# Altium PCB PCB_BearlyML Module Board_2022-12-21.pcbdoc
Units mm, origin at the board's own origin, x right, y up, seen from the top; angles counter-clockwise.
Board outline 141.4 x 81.42 mm, 2 copper layers (Top Layer, Bottom Layer); 59 components, 62 nets, 756 pads, 262 vias.
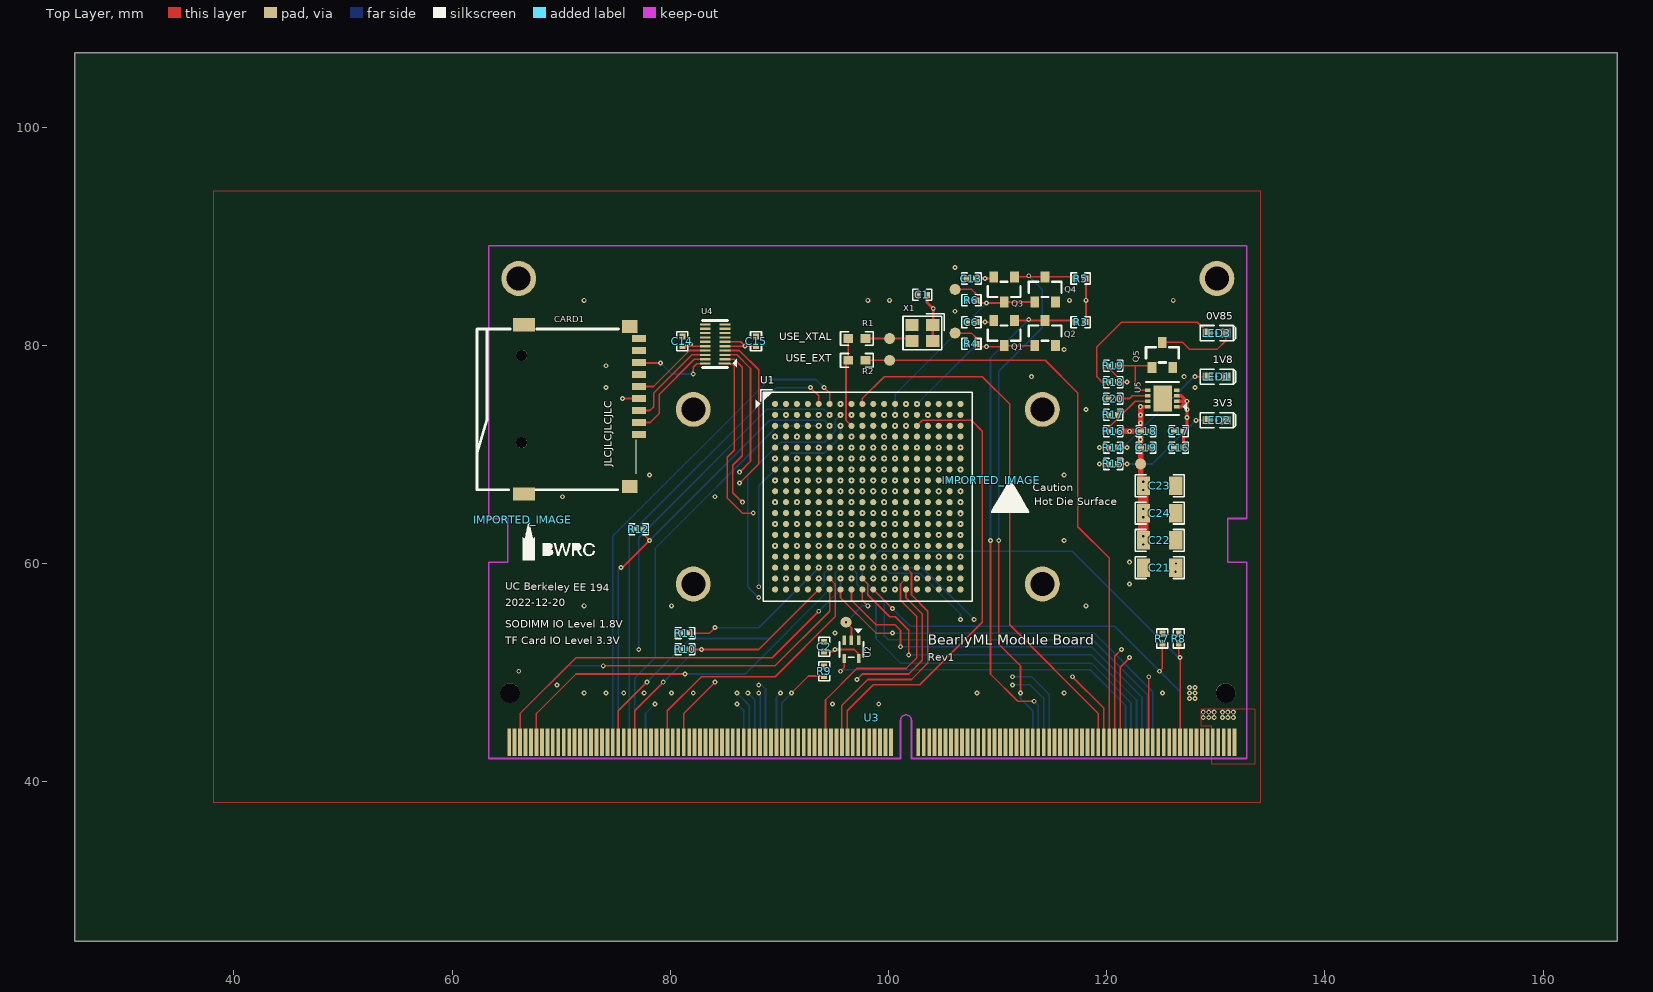
[diagram p0: Top Layer view]
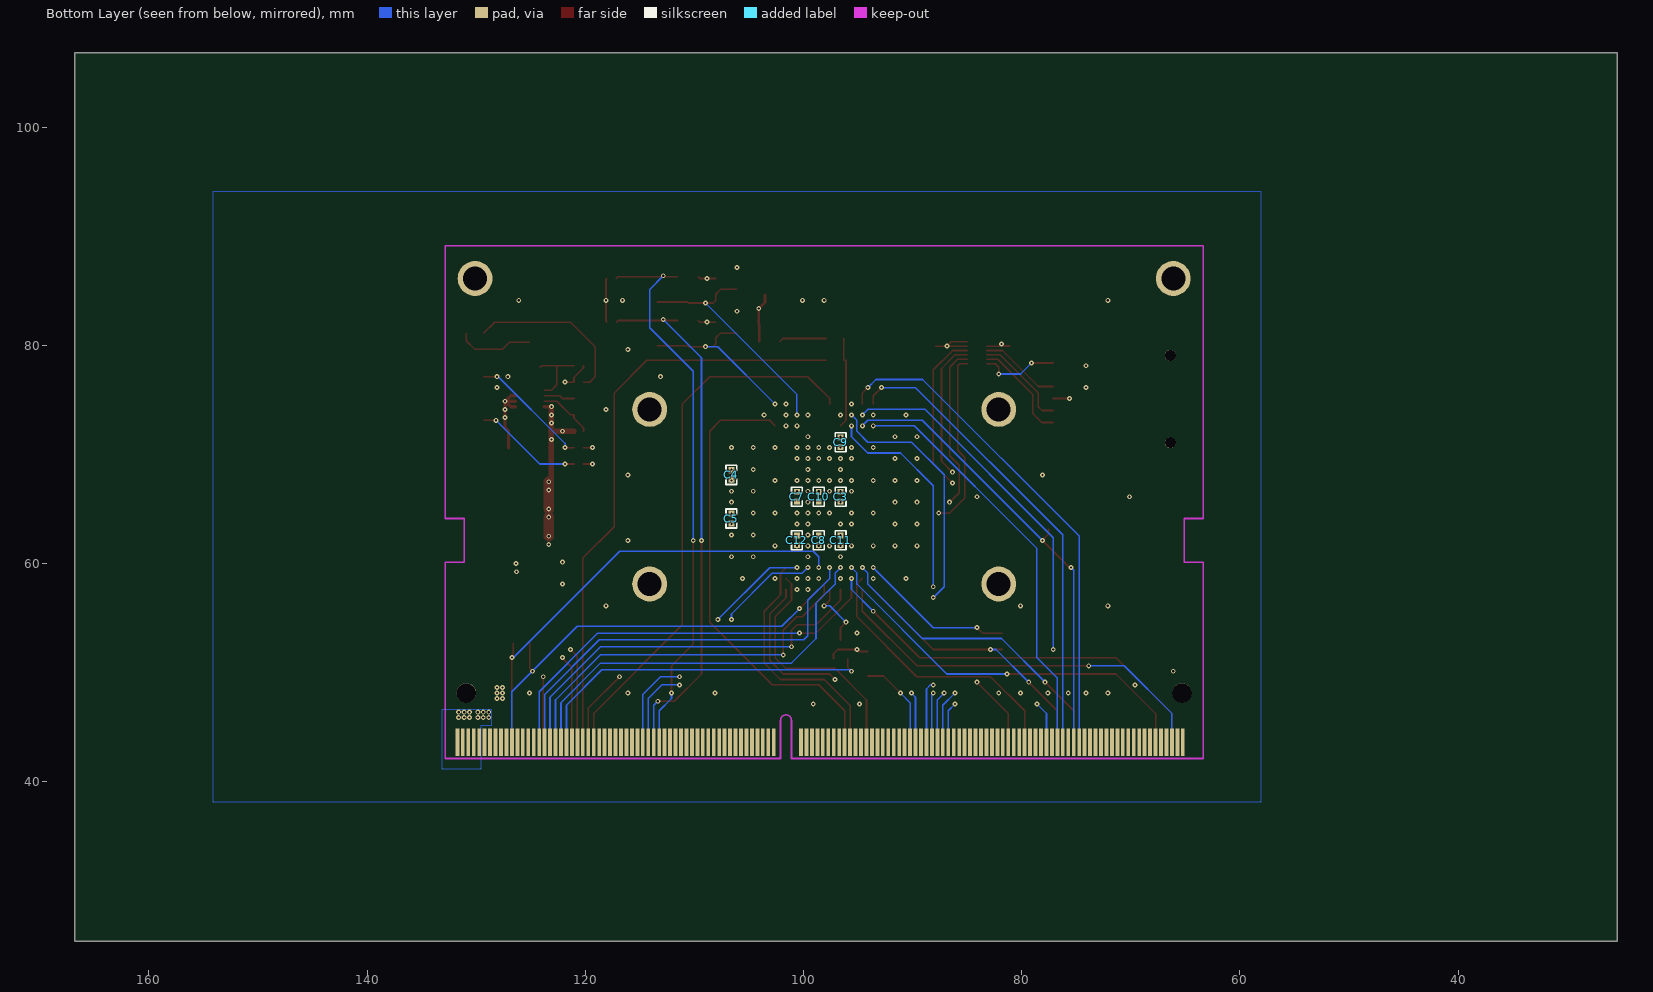
[diagram p1: Bottom Layer view, seen from below]

## Layer stack, top to bottom
Top Layer: signal copper (thickness not stored)
Dielectric: dielectric 0.32, FR-4, Dk 4.8
Bottom Layer: signal copper (thickness not stored)

## Board outline
166.8,25.4 25.4,25.4 25.4,106.825 166.8,106.825

## Components (designator, comment, footprint, x,y, rotation, side; value= is the part's Value field where it differs from the comment)
C1 "100n" CAPA-0402#1 103.1,84.625 r0 top
C2 "100n" CAPA-0402#1 94.099,52.376 r270 top
C3 "100n" CAPA-0402#2 96.599,66.125 r270 bottom
C4 "100n" CAPA-0402#2 106.599,68.124 r90 bottom
C5 "100n" CAPA-0402#2 106.599,64.126 r90 bottom
C6 "100n" CAPA-0402#1 107.599,82.124 r0 top
C7 "100n" CAPA-0402#2 100.599,66.125 r270 bottom
C8 "100n" CAPA-0402#2 98.6,62.124 r90 bottom
C9 "100n" CAPA-0402#2 96.599,71.124 r90 bottom
C10 "1u" CAPA-0402#2 98.6,66.125 r270 bottom
C11 "1u" CAPA-0402#2 96.599,62.124 r90 bottom
C12 "1u" CAPA-0402#2 100.599,62.124 r90 bottom
C13 "100n" CAPA-0402#1 107.599,86.125 r0 top
C14 "100n" CAPA-0402#1 81.1,80.374 r270 top
C15 "100n" CAPA-0402#1 87.851,80.374 r270 top
C16 "10u" CAPA-0402#1 126.599,70.626 r0 top
C17 "100n" CAPA-0402#1 126.599,72.124 r0 top
C18 "100n" CAPA-0402#1 123.599,72.124 r180 top
C19 "10u" CAPA-0402#1 123.599,70.626 r180 top
C20 "1n" CAPA-0402#1 120.599,75.124 r0 top
C21 "22u" CAPA-1206 124.849,59.625 r0 top
C22 "22u" CAPA-1206 124.849,62.124 r180 top
C23 "2u2" CAPA-1206 124.849,67.126 r180 top
C24 "2u2" CAPA-1206 124.849,64.624 r180 top
CARD1 "TF-01A" TF-SMD_TF-01A 71.849,74.126 r270 top
IMPORTED_IMAGE "IMPORTED_IMAGE" IMPORTED_IMAGE 109.395,67.638 r0 top
IMPORTED_IMAGE "IMPORTED_IMAGE" IMPORTED_IMAGE 66.49,64.004 r0 top
LED1 "LED-0603_B" LED-0603 130.099,77.126 r0 top
LED2 "LED-0603_B" LED-0603 130.099,73.125 r0 top
LED3 "LED-0603_B" LED-0603 130.099,81.124 r0 top
Q1 "AO3401A" SOT-23_L2.9-W1.3-P1.90-LS2.4-BR 110.6,81.125 r90 top
Q2 "AO3400A" SOT-23_L2.9-W1.3-P1.90-LS2.4-BR 114.35,81.125 r270 top
Q3 "AO3401A" SOT-23_L2.9-W1.3-P1.90-LS2.4-BR 110.6,85.125 r90 top
Q4 "AO3400A" SOT-23_L2.9-W1.3-P1.90-LS2.4-BR 114.35,85.125 r270 top
Q5 "FDV301N" SOT-23_L2.9-W1.3-P1.90-LS2.4-BR 125.099,79.125 r270 top
R1 "0R" RES-0603 97.1,80.625 r0 top
R2 "0R" RES-0603 97.1,78.625 r0 top
R3 "1k" RES-0402 117.599,82.124 r0 top
R4 "1k" RES-0402 107.599,80.125 r0 top
R5 "1k" RES-0402 117.599,86.125 r0 top
R6 "1k" RES-0402 107.599,84.126 r0 top
R7 "100k" RES-0402 125.1,53.125 r90 top
R8 "100k" RES-0402 126.599,53.125 r90 top
R9 "100k" RES-0402 94.099,50.125 r90 top
R10 "100k" RES-0402 81.351,52.124 r180 top
R11 "100k" RES-0402 81.351,53.626 r180 top
R12 "100k" RES-0402 77.1,63.125 r180 top
R14 "1k" RES-0402 120.599,70.626 r180 top
R15 "1k" RES-0402 120.599,69.125 r180 top
R16 "130k" RES-0402 120.599,72.124 r0 top
R17 "120k" RES-0402 120.599,73.626 r0 top
R18 "1k" RES-0402 120.599,76.625 r0 top
R19 "10k" RES-0402 120.599,78.124 r180 top
U1 "BearlyML" FC-PBGA-1.0-324-R18-C18_INTEL 98.1,66.125 r0 top
U2 "SN74LVC1G04DCKR" SOT-353_L2.1-W1.3-P0.65-LS2.3-BR 96.599,52.124 r90 top
U3 "SODIMM" "SODIMM 260" 98.1,42.124 r0 top
U4 "TXB0108DQSR" SON-20_L4.0-W2.0-P0.40-BL 84.101,80.124 r90 top
U5 "MCP1726-ADJE/MF" DFN-8_L3.0-W3.0-P0.50-LS3.0-BL-EP 125.101,75.125 r90 top
X1 "20MHz" OSC-SMD_4P-L2.5-W2.0-BL 103.1,81.125 r180 top

## Footprints (in the part's own frame and the unit in brackets; to place one, negate y for a bottom-side part, rotate by r counter-clockwise, add the part's x,y. Pads: shape width x height; smd on the part's side, far side on the other; paste and mask are expansions set on the pad)
CAPA-0402#1 [mm]
  rect 0.566x0.54 smd: 1(-0.433,0) 2(0.433,0)
  silkscreen extent -0.87,-0.5 0.87,0.5
CAPA-0402#2 [mm]
  rect 0.566x0.54 smd: 1(0.433,0) 2(-0.433,0)
  silkscreen extent -0.87,-0.5 0.87,0.5
CAPA-1206 [mm]
  rect 1.208x1.701 smd: 1(-1.479,0) 2(1.479,0)
  silkscreen extent -2.25,-1 2.25,1
DFN-8_L3.0-W3.0-P0.50-LS3.0-BL-EP [mm]
  rect 0.3x0.5 smd: 1(-0.75,-1.325) 2(-0.25,-1.325) 3(0.25,-1.325) 4(0.75,-1.325) 5(0.75,1.325) 6(0.25,1.325) 7(-0.25,1.325) 8(-0.75,1.325)
  rect 2.4x1.7 smd: 9(0,-0.025)
  silkscreen extent -1.5,-2.25 1.5,1.48
FC-PBGA-1.0-324-R18-C18_INTEL [mm]
  round 0.56 smd: A1(-8.5,8.5) A2(-7.5,8.5) A3(-6.5,8.5) A4(-5.5,8.5) A5(-4.5,8.5) A6(-3.5,8.5) A7(-2.5,8.5) A8(-1.5,8.5) A9(-0.5,8.5) A10(0.5,8.5) A11(1.5,8.5) A12(2.5,8.5) A13(3.5,8.5) A14(4.5,8.5) A15(5.5,8.5) A16(6.5,8.5) A17(7.5,8.5) A18(8.5,8.5) B1(-8.5,7.5) B2(-7.5,7.5) B3(-6.5,7.5) B4(-5.5,7.5) B5(-4.5,7.5) B6(-3.5,7.5) B7(-2.5,7.5) B8(-1.5,7.5) B9(-0.5,7.5) B10(0.5,7.5) B11(1.5,7.5) B12(2.5,7.5) B13(3.5,7.5) B14(4.5,7.5) B15(5.5,7.5) B16(6.5,7.5) B17(7.5,7.5) B18(8.5,7.5) C1(-8.5,6.5) C2(-7.5,6.5) C3(-6.5,6.5) C4(-5.5,6.5) C5(-4.5,6.5) C6(-3.5,6.5) C7(-2.5,6.5) C8(-1.5,6.5) C9(-0.5,6.5) C10(0.5,6.5) C11(1.5,6.5) C12(2.5,6.5) C13(3.5,6.5) C14(4.5,6.5) C15(5.5,6.5) C16(6.5,6.5) C17(7.5,6.5) C18(8.5,6.5) D1(-8.5,5.5) D2(-7.5,5.5) D3(-6.5,5.5) D4(-5.5,5.5) D5(-4.5,5.5) D6(-3.5,5.5) D7(-2.5,5.5) D8(-1.5,5.5) D9(-0.5,5.5) D10(0.5,5.5) D11(1.5,5.5) D12(2.5,5.5) D13(3.5,5.5) D14(4.5,5.5) D15(5.5,5.5) D16(6.5,5.5) D17(7.5,5.5) D18(8.5,5.5) E1(-8.5,4.5) E2(-7.5,4.5) E3(-6.5,4.5) E4(-5.5,4.5) E5(-4.5,4.5) E6(-3.5,4.5) E7(-2.5,4.5) E8(-1.5,4.5) E9(-0.5,4.5) E10(0.5,4.5) E11(1.5,4.5) E12(2.5,4.5) E13(3.5,4.5) E14(4.5,4.5) E15(5.5,4.5) E16(6.5,4.5) E17(7.5,4.5) E18(8.5,4.5) F1(-8.5,3.5) F2(-7.5,3.5) F3(-6.5,3.5) F4(-5.5,3.5) F5(-4.5,3.5) F6(-3.5,3.5) F7(-2.5,3.5) F8(-1.5,3.5) F9(-0.5,3.5) F10(0.5,3.5) F11(1.5,3.5) F12(2.5,3.5) F13(3.5,3.5) F14(4.5,3.5) F15(5.5,3.5) F16(6.5,3.5) F17(7.5,3.5) F18(8.5,3.5) G1(-8.5,2.5) G2(-7.5,2.5) G3(-6.5,2.5) G4(-5.5,2.5) G5(-4.5,2.5) G6(-3.5,2.5) G7(-2.5,2.5) G8(-1.5,2.5) G9(-0.5,2.5) G10(0.5,2.5) G11(1.5,2.5) G12(2.5,2.5) G13(3.5,2.5) G14(4.5,2.5) G15(5.5,2.5) G16(6.5,2.5) G17(7.5,2.5) G18(8.5,2.5) H1(-8.5,1.5) H2(-7.5,1.5) H3(-6.5,1.5) H4(-5.5,1.5) H5(-4.5,1.5) H6(-3.5,1.5) H7(-2.5,1.5) H8(-1.5,1.5) H9(-0.5,1.5) H10(0.5,1.5) H11(1.5,1.5) H12(2.5,1.5) H13(3.5,1.5) H14(4.5,1.5) H15(5.5,1.5) H16(6.5,1.5) H17(7.5,1.5) H18(8.5,1.5) J1(-8.5,0.5) J2(-7.5,0.5) J3(-6.5,0.5) J4(-5.5,0.5) J5(-4.5,0.5) J6(-3.5,0.5) J7(-2.5,0.5) J8(-1.5,0.5) J9(-0.5,0.5) J10(0.5,0.5) J11(1.5,0.5) J12(2.5,0.5) J13(3.5,0.5) J14(4.5,0.5) J15(5.5,0.5) J16(6.5,0.5) J17(7.5,0.5) J18(8.5,0.5) K1(-8.5,-0.5) K2(-7.5,-0.5) K3(-6.5,-0.5) K4(-5.5,-0.5) K5(-4.5,-0.5) K6(-3.5,-0.5) K7(-2.5,-0.5) K8(-1.5,-0.5) K9(-0.5,-0.5) K10(0.5,-0.5) K11(1.5,-0.5) K12(2.5,-0.5) K13(3.5,-0.5) K14(4.5,-0.5) K15(5.5,-0.5) K16(6.5,-0.5) K17(7.5,-0.5) K18(8.5,-0.5) L1(-8.5,-1.5) L2(-7.5,-1.5) L3(-6.5,-1.5) L4(-5.5,-1.5) L5(-4.5,-1.5) L6(-3.5,-1.5) L7(-2.5,-1.5) L8(-1.5,-1.5) L9(-0.5,-1.5) L10(0.5,-1.5) L11(1.5,-1.5) L12(2.5,-1.5) L13(3.5,-1.5) L14(4.5,-1.5) L15(5.5,-1.5) L16(6.5,-1.5) L17(7.5,-1.5) L18(8.5,-1.5) M1(-8.5,-2.5) M2(-7.5,-2.5) M3(-6.5,-2.5) M4(-5.5,-2.5) M5(-4.5,-2.5) M6(-3.5,-2.5) M7(-2.5,-2.5) M8(-1.5,-2.5) M9(-0.5,-2.5) M10(0.5,-2.5) M11(1.5,-2.5) M12(2.5,-2.5) M13(3.5,-2.5) M14(4.5,-2.5) M15(5.5,-2.5) M16(6.5,-2.5) M17(7.5,-2.5) M18(8.5,-2.5) N1(-8.5,-3.5) N2(-7.5,-3.5) N3(-6.5,-3.5) N4(-5.5,-3.5) N5(-4.5,-3.5) N6(-3.5,-3.5) N7(-2.5,-3.5) N8(-1.5,-3.5) N9(-0.5,-3.5) N10(0.5,-3.5) N11(1.5,-3.5) N12(2.5,-3.5) N13(3.5,-3.5) N14(4.5,-3.5) N15(5.5,-3.5) N16(6.5,-3.5) N17(7.5,-3.5) N18(8.5,-3.5) P1(-8.5,-4.5) P2(-7.5,-4.5) P3(-6.5,-4.5) P4(-5.5,-4.5) P5(-4.5,-4.5) P6(-3.5,-4.5) P7(-2.5,-4.5) P8(-1.5,-4.5) P9(-0.5,-4.5) P10(0.5,-4.5) P11(1.5,-4.5) P12(2.5,-4.5) P13(3.5,-4.5) P14(4.5,-4.5) P15(5.5,-4.5) P16(6.5,-4.5) P17(7.5,-4.5) P18(8.5,-4.5) R1(-8.5,-5.5) R2(-7.5,-5.5) R3(-6.5,-5.5) R4(-5.5,-5.5) R5(-4.5,-5.5) R6(-3.5,-5.5) R7(-2.5,-5.5) R8(-1.5,-5.5) R9(-0.5,-5.5) R10(0.5,-5.5) R11(1.5,-5.5) R12(2.5,-5.5) R13(3.5,-5.5) R14(4.5,-5.5) R15(5.5,-5.5) R16(6.5,-5.5) R17(7.5,-5.5) R18(8.5,-5.5) T1(-8.5,-6.5) T2(-7.5,-6.5) T3(-6.5,-6.5) T4(-5.5,-6.5) T5(-4.5,-6.5) T6(-3.5,-6.5) T7(-2.5,-6.5) T8(-1.5,-6.5) T9(-0.5,-6.5) T10(0.5,-6.5) T11(1.5,-6.5) T12(2.5,-6.5) T13(3.5,-6.5) T14(4.5,-6.5) T15(5.5,-6.5) T16(6.5,-6.5) T17(7.5,-6.5) T18(8.5,-6.5) U1(-8.5,-7.5) U2(-7.5,-7.5) U3(-6.5,-7.5) U4(-5.5,-7.5) U5(-4.5,-7.5) U6(-3.5,-7.5) U7(-2.5,-7.5) U8(-1.5,-7.5) U9(-0.5,-7.5) U10(0.5,-7.5) U11(1.5,-7.5) U12(2.5,-7.5) U13(3.5,-7.5) U14(4.5,-7.5) U15(5.5,-7.5) U16(6.5,-7.5) U17(7.5,-7.5) U18(8.5,-7.5) V1(-8.5,-8.5) V2(-7.5,-8.5) V3(-6.5,-8.5) V4(-5.5,-8.5) V5(-4.5,-8.5) V6(-3.5,-8.5) V7(-2.5,-8.5) V8(-1.5,-8.5) V9(-0.5,-8.5) V10(0.5,-8.5) V11(1.5,-8.5) V12(2.5,-8.5) V13(3.5,-8.5) V14(4.5,-8.5) V15(5.5,-8.5) V16(6.5,-8.5) V17(7.5,-8.5) V18(8.5,-8.5)
  silkscreen extent -10.25,-9.58 9.58,9.8
IMPORTED_IMAGE [mm]
  silkscreen extent 0,-3 3.5,0
LED-0603 [mm]
  rect 0.9x0.8 smd: 1(-0.8,0) 2(0.8,0)
  silkscreen extent -1.51,-0.69 1.7,0.69
OSC-SMD_4P-L2.5-W2.0-BL [mm]
  rect 1.2x1.1 smd: 1(-0.95,-0.75) 2(0.95,-0.75) 3(0.95,0.75) 4(-0.95,0.75)
  silkscreen extent -2.01,-1.76 1.78,1.53
RES-0402 [mm]
  rect 0.566x0.54 smd: 1(-0.433,0) 2(0.433,0)
  silkscreen extent -0.87,-0.5 0.87,0.5
RES-0603 [mm]
  rect 0.9x0.8 smd: 1(-0.8,0) 2(0.8,0)
  silkscreen extent -1.5,-0.62 1.5,0.62
"SODIMM 260" [mm]
  rect 0.35x2.5 smd far side: 1(-32.875,1.5) 3(-32.375,1.5) 5(-31.875,1.5) 7(-31.375,1.5) 9(-30.875,1.5) 11(-30.375,1.5) 13(-29.875,1.5) 15(-29.375,1.5) 17(-28.875,1.5) 19(-28.375,1.5) 21(-27.875,1.5) 23(-27.375,1.5) 25(-26.875,1.5) 27(-26.375,1.5) 29(-25.875,1.5) 31(-25.375,1.5) 33(-24.875,1.5) 35(-24.375,1.5) 37(-23.875,1.5) 39(-23.375,1.5) 41(-22.875,1.5) 43(-22.375,1.5) 45(-21.875,1.5) 47(-21.375,1.5) 49(-20.875,1.5) 51(-20.375,1.5) 53(-19.875,1.5) 55(-19.375,1.5) 57(-18.875,1.5) 59(-18.375,1.5) 61(-17.875,1.5) 63(-17.375,1.5) 65(-16.875,1.5) 67(-16.375,1.5) 69(-15.875,1.5) 71(-15.375,1.5) 73(-14.875,1.5) 75(-14.375,1.5) 77(-13.875,1.5) 79(-13.375,1.5) 81(-12.875,1.5) 83(-12.375,1.5) 85(-11.875,1.5) 87(-11.375,1.5) 89(-10.875,1.5) 91(-10.375,1.5) 93(-9.875,1.5) 95(-9.375,1.5) 97(-8.875,1.5) 99(-8.375,1.5) 101(-7.875,1.5) 103(-7.375,1.5) 105(-6.875,1.5) 107(-6.375,1.5) 109(-5.875,1.5) 111(-5.375,1.5) 113(-4.875,1.5) 115(-4.375,1.5) 117(-3.875,1.5) 119(-3.375,1.5) 121(-2.875,1.5) 123(-2.375,1.5) 125(-1.875,1.5) 127(-1.375,1.5) 129(-0.875,1.5) 131(-0.375,1.5) 133(0.125,1.5) 135(0.625,1.5) 137(1.125,1.5) 139(1.625,1.5) 141(2.125,1.5) 143(4.625,1.5) 145(5.125,1.5) 147(5.625,1.5) 149(6.125,1.5) 151(6.625,1.5) 153(7.125,1.5) 155(7.625,1.5) 157(8.125,1.5) 159(8.625,1.5) 161(9.125,1.5) 163(9.625,1.5) 165(10.125,1.5) 167(10.625,1.5) 169(11.125,1.5) 171(11.625,1.5) 173(12.125,1.5) 175(12.625,1.5) 177(13.125,1.5) 179(13.625,1.5) 181(14.125,1.5) 183(14.625,1.5) 185(15.125,1.5) 187(15.625,1.5) 189(16.125,1.5) 191(16.625,1.5) 193(17.125,1.5) 195(17.625,1.5) 197(18.125,1.5) 199(18.625,1.5) 201(19.125,1.5) 203(19.625,1.5) 205(20.125,1.5) 207(20.625,1.5) 209(21.125,1.5) 211(21.625,1.5) 213(22.125,1.5) 215(22.625,1.5) 217(23.125,1.5) 219(23.625,1.5) 221(24.125,1.5) 223(24.625,1.5) 225(25.125,1.5) 227(25.625,1.5) 229(26.125,1.5) 231(26.625,1.5) 233(27.125,1.5) 235(27.625,1.5) 237(28.125,1.5) 239(28.625,1.5) 241(29.125,1.5) 243(29.625,1.5) 245(30.125,1.5) 247(30.625,1.5) 249(31.125,1.5) 251(31.625,1.5) 253(32.125,1.5) 255(32.625,1.5) 257(33.125,1.5) 259(33.625,1.5)
  rect 0.35x2.5 smd: 2(-32.875,1.5) 4(-32.375,1.5) 6(-31.875,1.5) 8(-31.375,1.5) 10(-30.875,1.5) 12(-30.375,1.5) 14(-29.875,1.5) 16(-29.375,1.5) 18(-28.875,1.5) 20(-28.375,1.5) 22(-27.875,1.5) 24(-27.375,1.5) 26(-26.875,1.5) 28(-26.375,1.5) 30(-25.875,1.5) 32(-25.375,1.5) 34(-24.875,1.5) 36(-24.375,1.5) 38(-23.875,1.5) 40(-23.375,1.5) 42(-22.875,1.5) 44(-22.375,1.5) 46(-21.875,1.5) 48(-21.375,1.5) 50(-20.875,1.5) 52(-20.375,1.5) 54(-19.875,1.5) 56(-19.375,1.5) 58(-18.875,1.5) 60(-18.375,1.5) 62(-17.875,1.5) 64(-17.375,1.5) 66(-16.875,1.5) 68(-16.375,1.5) 70(-15.875,1.5) 72(-15.375,1.5) 74(-14.875,1.5) 76(-14.375,1.5) 78(-13.875,1.5) 80(-13.375,1.5) 82(-12.875,1.5) 84(-12.375,1.5) 86(-11.875,1.5) 88(-11.375,1.5) 90(-10.875,1.5) 92(-10.375,1.5) 94(-9.875,1.5) 96(-9.375,1.5) 98(-8.875,1.5) 100(-8.375,1.5) 102(-7.875,1.5) 104(-7.375,1.5) 106(-6.875,1.5) 108(-6.375,1.5) 110(-5.875,1.5) 112(-5.375,1.5) 114(-4.875,1.5) 116(-4.375,1.5) 118(-3.875,1.5) 120(-3.375,1.5) 122(-2.875,1.5) 124(-2.375,1.5) 126(-1.875,1.5) 128(-1.375,1.5) 130(-0.875,1.5) 132(-0.375,1.5) 134(0.125,1.5) 136(0.625,1.5) 138(1.125,1.5) 140(1.625,1.5) 142(2.125,1.5) 144(4.625,1.5) 146(5.125,1.5) 148(5.625,1.5) 150(6.125,1.5) 152(6.625,1.5) 154(7.125,1.5) 156(7.625,1.5) 158(8.125,1.5) 160(8.625,1.5) 162(9.125,1.5) 164(9.625,1.5) 166(10.125,1.5) 168(10.625,1.5) 170(11.125,1.5) 172(11.625,1.5) 174(12.125,1.5) 176(12.625,1.5) 178(13.125,1.5) 180(13.625,1.5) 182(14.125,1.5) 184(14.625,1.5) 186(15.125,1.5) 188(15.625,1.5) 190(16.125,1.5) 192(16.625,1.5) 194(17.125,1.5) 196(17.625,1.5) 198(18.125,1.5) 200(18.625,1.5) 202(19.125,1.5) 204(19.625,1.5) 206(20.125,1.5) 208(20.625,1.5) 210(21.125,1.5) 212(21.625,1.5) 214(22.125,1.5) 216(22.625,1.5) 218(23.125,1.5) 220(23.625,1.5) 222(24.125,1.5) 224(24.625,1.5) 226(25.125,1.5) 228(25.625,1.5) 230(26.125,1.5) 232(26.625,1.5) 234(27.125,1.5) 236(27.625,1.5) 238(28.125,1.5) 240(28.625,1.5) 242(29.125,1.5) 244(29.625,1.5) 246(30.125,1.5) 248(30.625,1.5) 250(31.125,1.5) 252(31.625,1.5) 254(32.125,1.5) 256(32.625,1.5) 258(33.125,1.5) 260(33.625,1.5)
  round 1.8 hole 1.8 unplated: ""(-32.8,6) ""(32.8,6)
SON-20_L4.0-W2.0-P0.40-BL [mm]
  rect 0.2x1.1 smd: 1(-1.8,-0.85)
  rect 0.2x1 smd: 2(-1.4,-0.9) 3(-1,-0.9) 4(-0.6,-0.9) 5(-0.2,-0.9) 6(0.2,-0.9) 7(0.6,-0.9) 8(1,-0.9) 9(1.4,-0.9) 10(1.8,-0.9) 11(1.8,0.9) 12(1.4,0.9) 13(1,0.9) 14(0.6,0.9) 15(0.2,0.9) 16(-0.2,0.9) 17(-0.6,0.9) 18(-1,0.9) 19(-1.4,0.9) 20(-1.8,0.9)
  silkscreen extent -2.16,-2 2.16,1.14
SOT-23_L2.9-W1.3-P1.90-LS2.4-BR [mm]
  rect 1x0.8 smd: 1(1.15,-0.95) 2(1.15,0.95) 3(-1.15,0)
  silkscreen extent -0.7,-1.5 0.7,1.5
SOT-353_L2.1-W1.3-P0.65-LS2.3-BR [mm]
  rect 0.839x0.315 smd: 1(0.844,-0.65) 2(0.844,0) 3(0.844,0.65) 4(-0.844,0.65) 5(-0.844,-0.65)
  silkscreen extent -0.7,-1.1 1.88,1.1
TF-SMD_TF-01A [mm]
  rect 0.6x1.3 smd: 1(2.301,5.276) 2(1.201,5.276) 3(0.101,5.276) 4(-0.999,5.276) 5(-2.099,5.276) 6(-3.199,5.276) 7(-4.299,5.276) 8(-5.399,5.276) 9(-6.499,5.276)
  rect 1.2x1.4 smd: 10(-7.599,4.426) 13(7.081,4.426)
  rect 1.2x2 smd: 11(-7.76,-5.276) 12(7.76,-5.276)
  round 1 hole 1 unplated: ""(-4.95,-5.478) ""(3.05,-5.475)
  silkscreen extent -7.37,-9.56 7.37,4.97

## Free pads (board coordinates)
  round 3.2 hole 2.2: 1(66.1,86.125) 1(82.1,58.125) 1(82.1,74.125) 1(114.1,58.125) 1(114.1,74.125) 1(130.1,86.125)
  round 1 smd: 2(96.1,54.625) 2(100.1,78.625) 2(100.1,80.625) 2(106.1,81.125) 2(106.1,85.125) 2(123.1,69.125)

## Via types
v1: diameter 0.45, hole 0.2, Top Layer to Bottom Layer, tented both sides, 262 vias

## Nets (pads, with @x,y where several pads share a name; then routed paths per layer and width w, separated by ;. In a path a pad name is that pad's centre, name@x,y a point inside that pad or via, vN(x,y) a via of type N, cw(c..) or ccw(c..) an arc to the next point about the centre after c; other vN are vias at no path point)
0V85: C7.2 C8.2 C9.2 C10.2 C11.2 C12.2 C18.2 C19.2 C22.2 C23.2 C24.2 pad.2@123.1,69.125 R16.2 U1.A7 U1.E7 U1.E8 U1.E9 U1.E10 U1.E11 U1.E12 U1.F7 U1.F8 U1.F9 U1.F10 U1.F11 U1.F12 U1.H7 U1.H8 U1.J7 U1.J9 U1.J10 U1.J12 U1.L7 U1.L12 U1.M7 U1.M8 U1.M11 U1.M12 U1.P7 U1.P8 U1.P9 U1.P10 U1.P11 U1.P12 U5.8 | length 15.7
  Top Layer w0.15: v1(123.35,62.5) 123.35,62.146 C22.2@123.371,62.125 ; v1(123.35,64.25) v1(123.35,65)
  Top Layer w0.3: v1@123.1,74.375 U5.8
  Top Layer w0.5: R16.2@121.033,72.125 v1(122.1,72.125) C18.2@123.167,72.125 ; v1(123.1,74.375) v1(123.1,73.625) v1(123.1,72.875) 123.1,72.192 C18.2 ; C23.2 123.371,67.478 v1(123.35,67.5) 123.1,67.75 123.1,69.125 123.1,70.558 C19.2 123.1,70.692 v1(123.1,71.375) 123.1,72.058 C18.2@123.167,72.125
  Top Layer w1: v1(123.35,62.5) v1(123.35,64.25) ; v1(123.35,65) v1(123.35,67.5)
  other v1: 95.6,61.625 96.6,61.625 97.6,61.625 98.6,61.625 99.6,61.625 100.6,61.625 123.35,61.75 95.6,63.625 96.6,63.625 99.6,63.625 100.6,63.625 95.6,64.625 100.6,64.625 95.6,66.625 97.6,66.625 98.6,66.625 100.6,66.625 123.35,66.75 95.6,67.625 96.6,67.625 95.6,69.625 96.6,69.625 97.6,69.625 98.6,69.625 99.6,69.625 100.6,69.625 95.6,70.625 96.6,70.625 97.6,70.625 98.6,70.625 99.6,70.625 100.6,70.625 95.6,74.625
1V8: C1.2 C2.2 C3.2 C4.2 C5.2 C6.2 C13.2 C15.2 C21.2 Q1.2 Q3.2 R3.2 R5.2 R14.2 U1.H9 U1.H10 U1.H11 U1.H12 U1.H18 U1.J8 U1.J11 U1.K18 U1.L9 U1.L10 U1.L11 U1.M18 U2.5 U3.251 U3.253 U3.255 U3.257 U3.259 U4.5 U4.6 X1.1 X1.4 | length 21.7
  Top Layer w0.15: U4.5 v1(86.85,79.925) ; U4.6 86.451,80.324 v1(86.85,79.925) ; C15.2 v1(86.85,79.925) ; C2.2 94.917,51.942 v1(95.099,52.125) 96.85,52.124 97.249,51.726 U2.5 ; X1.1@104.05,81.875 X1.1@104.05,82.125 ; C6.2@108.033,82.125 v1(108.85,82.125) 109.5,82.125 Q1.2 ; C13.2@108.033,86.125 v1(108.85,86.125) 109.5,86.125 Q3.2@109.65,86.275 ; R3.2@118.033,82.125 118.1,82.192 v1(118.1,84.125) 118.1,86.058 R5.2@118.033,86.125 ; v1(119.35,70.625) R14.2
  Top Layer w0.25: C1.2@103.533,84.624 103.533,83.943 104.099,83.374 104.1,81.925 X1.1@104.05,81.875 ; X1.4@104.05,80.375 X1.1@104.05,81.875
  other v1: 128.85,45.875 129.35,45.875 129.85,45.875 128.85,46.375 129.35,46.375 129.85,46.375 126.308,59.25 126.35,60 106.6,63.625 97.6,64.625 98.6,64.625 99.6,64.625 106.6,65.625 96.6,66.625 99.6,66.625 97.6,67.625 98.6,67.625 99.6,67.625 100.6,67.625 106.6,67.625 104.1,83.375
3V3: C14.2 C16.2 C17.2 CARD1.4 R15.2 R18.2 R19.2 U3.252 U3.254 U3.256 U3.258 U3.260 U4.16 U5.1 U5.2 U5.3 | length 14.8
  Top Layer w0.15: v1(75.6,75.124) CARD1.4@77.126,75.124 ; C14.2 81.667,79.942 v1(81.85,80.125) 82.05,79.925 U4.16 ; v1(119.35,69.125) R15.2@120.167,69.125 ; R19.2@120.167,78.125 120.167,77.933 121.033,77.067 121.033,76.625 v1(121.85,76.625)
  Top Layer w0.3: U5.1@126.425,74.375 126.85,74.375 v1(127.35,74.875) ; U5.2 v1(127.35,74.875) ; U5.3 126.85,75.375 v1(127.35,74.875) ; C16.2@127.033,70.625 127.033,72.125 127.35,72.442 v1(127.35,73.375) ; v1(127.35,73.375) v1(127.35,74.125) v1@127.35,74.875
  other v1: 130.625,45.875 131.1,45.875 131.6,45.875 130.625,46.375 131.1,46.375 131.6,46.375
20MHZ_CYRSTAL: pad.2@100.1,80.625 R1.2 X1.3 | length 4.4
  Top Layer w0.15: R1.2 100.1,80.625 101.9,80.625 X1.3@102.15,80.375
BOOT_SEL: R8.1 U1.T10 U3.240 | length 42.5
  Top Layer w0.15: R8.1 126.6,51.5 v1(126.725,51.375) ; U3.240 v1(126.725,51.375)
  Bottom Layer w0.15: v1(98.6,59.625) 98.6,60.625 99.1,61.125 116.85,61.125 126.6,51.375 v1(126.725,51.375)
C20_2: C20.2 U5.6 | length 2.8
  Top Layer w0.15: C20.2@121.034,75.124 122.1,75.124 122.349,75.376 U5.6@123.774,75.376
CARD1_2: CARD1.2 U4.19 | length 9.5
  Top Layer w0.15: CARD1.2@77.127,72.925 78.148,72.925 78.974,73.75 78.974,75.5 82.199,78.726 U4.19
CARD1_3: CARD1.3 U4.18 | length 8.9
  Top Layer w0.15: CARD1.3@77.127,74.024 78.125,74.024 78.476,74.375 78.476,75.625 81.976,79.125 U4.18
CARD1_5: CARD1.5 U4.17 | length 7.4
  Top Layer w0.15: CARD1.5@77.127,76.224 78.45,76.224 81.75,79.526 U4.17
CARD1_7: CARD1.7 U4.20 | length 7.3
  Top Layer w0.15: CARD1.7@77.126,78.424 77.176,78.375 v1(79.1,78.375) ; v1@82.1,77.375 82.1,77.999 82.426,78.325 U4.20
  Bottom Layer w0.15: v1(79.1,78.375) 80.1,77.375 v1(82.1,77.375)
DEBUG_CLK: U1.A9 U3.210 | length 50.2
  Top Layer w0.15: U1.A9@97.599,74.624 97.599,75.124 99.601,77.126 108.6,77.126 111.1,74.626 111.1,54.375 119.225,46.249 U3.210
GND: C1.1 C2.1 C3.1 C4.1 C5.1 C6.1 C7.1 C8.1 C9.1 C10.1 C11.1 C12.1 C13.1 C14.1 C15.1 C16.1 C17.1 C18.1 C19.1 C20.1 C21.1 C22.1 C23.1 C24.1 CARD1.6 CARD1.10 CARD1.11 CARD1.12 CARD1.13 LED1.2 LED2.2 Q2.2 Q4.2 Q5.2 R4.1 R6.1 R7.2 R8.2 R9.2 R10.2 R11.2 R12.2 R17.1 U1.B2 U1.B5 U1.B8 U1.B11 U1.B14 U1.B15 U1.D1 U1.D2 U1.D3 U1.D7 U1.D8 U1.D9 U1.D10 U1.D11 U1.D12 U1.D16 U1.E3 U1.E5 U1.E14 U1.E16 U1.E17 U1.E18 U1.F1 U1.F2 U1.F3 U1.F16 U1.G3 U1.G7 U1.G8 U1.G9 U1.G10 U1.G11 U1.G12 U1.G16 U1.G17 U1.G18 U1.H1 U1.H2 U1.H3 U1.H5 U1.H14 U1.H16 U1.H17 U1.J3 U1.J16 U1.J17 U1.J18 U1.K1 U1.K2 U1.K3 U1.K7 U1.K8 U1.K9 U1.K10 U1.K11 U1.K12 U1.K16 U1.L3 U1.L5 U1.L14 U1.L16 U1.L17 U1.L18 U1.M1 U1.M2 U1.M3 U1.M16 U1.N3 U1.N7 U1.N8 U1.N9 U1.N10 U1.N11 U1.N12 U1.N16 U1.N17 U1.N18 U1.P1 U1.P2 U1.P3 U1.P5 U1.P14 U1.P16 U1.R3 U1.R7 U1.R8 U1.R9 U1.R10 U1.R11 U1.R12 U1.R16 U1.R17 U1.R18 U1.U2 U1.U5 U1.U8 U1.U11 U1.U14 U1.U17 U2.3 U3.1 U3.2 U3.3 U3.4 U3.7 U3.8 U3.10 U3.13 U3.14 U3.19 U3.20 U3.25 U3.26 U3.31 U3.32 U3.37 U3.38 U3.40 U3.43 U3.44 U3.46 U3.49 U3.50 U3.55 U3.56 U3.58 U3.61 U3.62 U3.64 U3.67 U3.68 U3.73 U3.74 U3.79 U3.80 U3.85 U3.86 U3.102 U3.107 U3.113 U3.119 U3.125 U3.129 U3.132 U3.135 U3.138 U3.141 U3.144 U3.146 U3.147 U3.152 U3.153 U3.158 U3.159 U3.164 U3.165 U3.170 U3.171 U3.176 U3.177 U3.200 U3.201 U3.217 U3.231 U3.241 U3.242 U3.243 U3.244 U3.245 U3.246 U3.247 U3.248 U3.249 U3.250 U4.15 U5.4 U5.9 X1.2
  other v1: 94.85,47.125 99.1,47.125 127.6,47.625 128.1,47.625 72.1,48.125 74.1,48.125 75.725,48.125 77.6,48.125 80.1,48.125 82.1,48.125 108.1,48.125 116.1,48.125 125.1,48.125 127.6,48.125 128.1,48.125 127.6,48.625 128.1,48.625 69.6,48.875 66.1,50.125 95.1,53.625 72.1,56.125 80.1,56.125 118.1,56.125 122.1,58.125 90.6,58.625 93.6,58.625 96.6,58.625 99.6,58.625 102.6,58.625 105.6,58.625 122.1,60.125 96.6,60.625 99.6,60.625 104.6,60.625 106.6,60.625 89.6,61.625 91.6,61.625 93.6,61.625 102.6,61.625 116.1,62.125 96.6,62.625 99.6,62.625 104.6,62.625 106.6,62.625 89.6,63.625 91.6,63.625 106.6,64.558 93.6,64.625 102.6,64.625 104.6,64.625 89.6,65.625 91.6,65.625 96.6,65.625 99.6,65.625 70.1,66.125 84.1,66.125 104.6,66.625 106.6,66.625 89.6,67.625 91.6,67.625 93.6,67.625 102.6,67.625 78.1,68.125 116.1,68.125 96.6,68.625 99.6,68.625 104.6,68.625 106.6,68.625 89.6,69.625 91.6,69.625 93.6,70.625 102.6,70.625 104.6,70.625 106.6,70.625 89.6,71.625 91.6,71.625 96.6,71.625 99.6,71.625 90.6,73.625 93.6,73.625 96.6,73.625 99.6,73.625 103.6,73.625 118.1,74.125 74.1,76.125 128.1,76.125 113.1,77.125 127.1,77.125 74.1,78.125 116.1,79.625 106.1,83.125 72.1,84.125 98.1,84.125 100.1,84.125 116.6,84.125 126.1,84.125 106.1,87.125
GPIO_PA0: U1.V13 U3.87 | length 29.5
  Top Layer w0.15: v1(97.1,49.375) 97.599,49.874 101.853,49.874 103.1,51.121 103.1,55.374 101.6,56.874 U1.V13@101.6,57.624
  Mid-Layer 1 w0.15: v1(86.1,47.125) 93.85,47.126 96.101,49.374 v1@97.099,49.374
  Bottom Layer w0.15: v1(86.1,47.125) 86.725,46.5 U3.87
GPIO_PA1: U1.U13 U3.118 | length 21.9
  Top Layer w0.15: U3.118 94.224,47.499 97.099,50.374 101.6,50.374 102.601,51.375 102.601,55.124 101.1,56.625 101.1,58.124 U1.U13@101.6,58.624
GPIO_PA2: U1.T13 U3.124 | length 22.4
  Top Layer w0.15: U3.124 95.725,47.001 98.1,49.376 102.1,49.376 103.599,50.875 103.599,55.627 102.1,57.126 102.1,59.125 U1.T13
GPIO_PA3: U1.C14 U3.126 | length 42.7
  Top Layer w0.15: U3.126 96.225,46.501 98.6,48.876 102.85,48.876 108.6,54.626 108.6,72.124 107.599,73.125 103.101,73.125 U1.C14
I2C0_SCL: Q3.1 Q4.3 R5.1 U3.185 | length 52
  Top Layer w0.15: v1@110.099,62.124 110.099,52.625 112.1,50.626 v1@112.1,48.124 ; Q3.1@111.55,86.275 112.75,86.275 v1(112.85,86.375) ; v1@112.85,86.374 112.948,86.275 114.35,86.275 117.017,86.275 R5.1
  Bottom Layer w0.15: v1(110.1,62.125) 110.1,77.625 114.1,81.625 114.1,85.125 v1(112.85,86.375) ; v1@112.1,48.124 112.1,47.624 113.226,46.498 U3.185
  other v1: 112.1,48.125
I2C0_SCL_INV: pad.2@106.1,85.125 Q3.3 Q4.1 R6.2 U1.B12 | length 21.9
  Top Layer w0.15: pad.2@106.101,85.124 107.599,85.124 108.034,84.692 R6.2@108.034,84.126 ; R6.2@108.033,84.125 108.283,83.875 v1(108.975,83.875) 110.5,83.875 Q3.3 Q4.1
  Bottom Layer w0.15: v1(100.6,73.625) 100.599,75.5 v1@108.974,83.874
I2C0_SDA: Q1.1 Q2.3 R3.1 U3.187 | length 48.7
  Top Layer w0.15: v1@109.35,62.124 109.35,49.874 111.849,47.375 v1@113.35,47.375 ; Q1.1 112.75,82.275 v1(112.85,82.375) ; v1(112.85,82.375) 112.95,82.275 Q2.3 117.017,82.275 R3.1@117.167,82.125
  Bottom Layer w0.15: v1(109.35,62.125) 109.35,78.875 v1(112.85,82.375) ; v1(113.35,47.375) 113.725,47 U3.187
I2C0_SDA_INV: pad.2@106.1,81.125 Q1.3 Q2.1 R4.2 U1.A14 | length 16.7
  Top Layer w0.15: pad.2@106.101,81.124 107.599,81.124 108.034,80.692 R4.2@108.034,80.125 ; R4.2@108.033,80.125 108.283,79.875 v1(108.975,79.875) 110.5,79.875 Q1.3 Q2.1
  Bottom Layer w0.15: v1(102.6,74.625) 107.85,79.875 v1@108.975,79.875
I2C1_SCL: U1.T11 U3.189 | length 24.6
  Mid-Layer 1 w0.15: v1(106.6,54.875) 106.6,53.625 v1@111.35,48.875
  Bottom Layer w0.15: v1(99.6,59.625) 100.099,59.125 102.85,59.125 106.601,55.376 v1@106.601,54.875 ; v1@111.351,48.876 112.974,48.876 114.224,47.626 U3.189
  other v1: 111.35,48.875
I2C1_SDA: U1.T12 U3.191 | length 24.3
  Mid-Layer 1 w0.15: v1(107.85,54.875) 111.35,51.375 v1@111.35,49.625
  Bottom Layer w0.15: v1(100.6,59.625) 103.1,59.625 v1(107.85,54.875) ; v1@111.351,49.625 113.099,49.625 114.724,48 U3.191
  other v1: 111.35,49.625
JTAG_STATE0: U1.V12 U3.212 | length 26.8
  Top Layer w0.15: v1(116.85,49.625) 119.725,46.75 U3.212
  Mid-Layer 1 w0.15: v1(100.6,57.625) 102.1,56.125 110.35,56.125 v1(116.85,49.625)
JTAG_STATE1: U1.U10 U3.216 | length 34.6
  Top Layer w0.15: U3.216@120.725,43.625 120.725,51.5 v1(121.35,52.125)
  Mid-Layer 1 w0.15: v1(98.6,58.625) 99.1,59.125 109.85,59.125 116.85,52.125 v1(121.35,52.125)
JTAG_STATE2: U1.U12 U3.218 | length 32.6
  Top Layer w0.15: U3.218 121.225,50.5 v1(122.1,51.375)
  Mid-Layer 1 w0.15: v1(100.6,58.625) 102.35,56.875 111.1,56.875 116.6,51.375 v1(122.1,51.375)
JTAG_STATE3: U1.V11 U3.228 | length 34.1
  Top Layer w0.15: U3.228 123.85,43.625 v1(123.85,49.625)
  Mid-Layer 1 w0.15: v1(99.6,57.625) 101.85,55.375 109.85,55.375 116.1,49.125 123.35,49.125 v1(123.85,49.625)
JTAG_TCK: R12.1 U1.C6 U3.41 | length 42.3
  Top Layer w0.15: v1(75.475,59.625) 75.6,59.625 v1(78.1,62.125) 77.533,62.692 R12.1
  Bottom Layer w0.15: U3.41 75.224,59.375 v1(75.475,59.625) ; v1@78.1,62.124 89.101,73.125 94.099,73.125 v1(94.6,72.625)
JTAG_TDI: U1.A5 U3.45 | length 43
  Top Layer w0.15: v1(92.85,76.125) 93.6,75.375 U1.A5
  Bottom Layer w0.15: U3.45 76.225,62.625 89.725,76.125 v1(92.85,76.125)
JTAG_TDO: U1.C5 U3.47 | length 38.2
  Bottom Layer w0.15: U3.47 76.726,49.501 78.6,51.375 78.6,61.375 89.85,72.625 v1(93.6,72.625)
JTAG_TMS: U1.A6 U3.39 | length 46.2
  Top Layer w0.15: v1(94.1,76.125) 94.6,75.625 U1.A6@94.6,74.624
  Bottom Layer w0.15: U3.39 74.724,62.518 89.08,76.874 93.35,76.874 v1(94.1,76.125)
JTAG_TRST: U1.B6 U3.51 | length 42.3
  Mid-Layer 1 w0.15: v1(77.1,52.125) 78.6,50.625 v1(78.6,47.125)
  Bottom Layer w0.15: v1@77.099,52.124 77.099,62.373 88.849,74.126 94.099,74.126 v1(94.6,73.625) ; U3.51 77.725,46.25 v1(78.6,47.125)
LED2_1: LED2.1 R15.1 | length 10
  Top Layer w0.15: R15.1@121.033,69.125 v1(121.85,69.125) ; v1@128.1,73.125 LED2.1
  Bottom Layer w0.15: v1(121.85,69.125) 124.179,69.125 v1(128.179,73.125)
LED3_2: LED3.2 Q5.3 | length 7.1
  Top Layer w0.15: Q5.3 126.949,80.275 127.599,79.625 130.099,79.625 130.899,80.425 LED3.2
QSPI0_CS: U1.T9 U3.227 | length 37.8
  Bottom Layer w0.15: v1(97.6,59.625) 97.599,58.624 99.601,56.623 99.601,53.374 99.974,53.001 118.725,53.001 123.726,48 U3.227
QSPI0_DQ0: U2.4 U3.219 | length 32.2
  Top Layer w0.15: v1(95.6,50.125) 95.95,50.475 U2.4@95.95,51.281
  Bottom Layer w0.15: v1(95.6,50.125) 95.725,50.25 118.475,50.25 121.725,47 U3.219
QSPI0_DQ0_INV: pad.2@96.1,54.625 U1.V9 U2.2 | length 6.2
  Top Layer w0.15: v1(96.1,54.625) 96.6,54.125 U2.2@96.6,52.969 ; U1.V9 97.6,56.625 v1(98.1,56.125)
  Bottom Layer w0.15: v1(96.1,54.625) 97.6,56.125 v1(98.1,56.125)
QSPI0_DQ1: U1.T8 U3.221 | length 36.9
  Bottom Layer w0.15: v1@96.599,59.625 97.099,59.125 97.099,58.124 98.849,56.374 98.849,53.125 101.1,50.875 118.6,50.875 122.225,47.25 U3.221
  other v1: 96.6,59.625
QSPI0_DQ2: U1.U9 U3.223 | length 35.5
  Top Layer w0.15: U1.U9@97.599,58.624 98.1,58.124 98.1,57.126 100.101,55.124 100.602,55.124 101.849,53.875 v1@101.849,51.624
  Bottom Layer w0.15: v1(101.85,51.625) 118.6,51.625 122.725,47.5 U3.223
QSPI0_DQ3: U1.V8 U3.225 | length 36.3
  Top Layer w0.15: U1.V8@96.599,57.624 96.599,56.625 98.849,54.375 100.599,54.375 101.1,53.875 v1(101.1,52.375)
  Bottom Layer w0.15: v1(101.1,52.375) 118.6,52.375 123.226,47.749 U3.225
QSPI0_SCLK: U1.V7 U3.229 | length 37.6
  Top Layer w0.15: U1.V7@95.601,57.624 95.601,56.874 98.849,53.626 v1(100.35,53.625)
  Bottom Layer w0.15: v1(100.35,53.625) 118.849,53.626 124.224,48.251 U3.229
R14_1: LED1.1 R14.1 | length 11.2
  Top Layer w0.15: R14.1@121.033,70.625 v1(121.85,70.625) ; v1(128.1,77.125) LED1.1
  Bottom Layer w0.15: v1(121.85,70.625) 121.849,70.999 127.975,77.126 v1(128.1,77.125)
R17_2: R16.1 R17.2 U5.7 | length 5.1
  Top Layer w0.15: R16.1@120.167,72.125 120.167,72.442 121.033,73.308 R17.2@121.033,73.625 ; R17.2@121.034,73.626 121.351,73.626 122.601,74.875 U5.7@123.774,74.875
R18_1: LED3.1 R18.1 | length 15.6
  Top Layer w0.15: R18.1 119.6,76.625 119.1,77.125 119.1,79.875 121.35,82.125 128.3,82.125 LED3.1@129.3,81.125
R19_1: Q5.1 R19.1 U5.5 | length 7.9
  Top Layer w0.15: R19.1@121.033,78.125 124,78.125 Q5.1 ; R19.1@121.034,78.124 122.601,78.124 122.601,76.374 123.101,75.876 U5.5@123.774,75.876
RESET: R7.1 U1.V10 U3.239 | length 39.3
  Top Layer w0.15: U1.V10 v1(100.35,55.875) ; v1@124.85,50.125 125.1,50.375 R7.1
  Bottom Layer w0.15: v1(100.35,55.875) 101.976,54.25 120.724,54.25 v1(124.85,50.125) ; v1@124.849,50.125 126.726,48.248 U3.239
S$12913: 
S$25875: 
SPI1_CS: U1.B13 U3.95 U4.2 | length 58.5
  Top Layer w0.15: U4.2 85.875,78.726 86.599,77.999 86.599,69.874 85.725,69 85.725,66.501 v1@86.599,65.625
  Mid-Layer 1 w0.15: v1(86.6,65.625) 86.6,55.374 88.1,53.875 v1(88.1,48.875) ; v1(86.6,65.625) 91.1,70.125 101.1,70.125 102.1,71.126 102.1,73.125 v1(101.6,73.625)
  Bottom Layer w0.15: v1(88.1,48.875) 88.349,48.876 88.725,48.5 U3.95
SPI1_MISO: U1.A13 U3.93 U4.1 | length 62.2
  Top Layer w0.15: U4.1 85.651,78.325 85.849,78.124 85.849,70.374 85.225,69.75 85.225,65.998 86.599,64.624 v1@87.6,64.624
  Mid-Layer 1 w0.15: v1(87.6,64.625) 87.6,56.124 89.601,54.123 89.601,48.876 88.849,48.124 v1@88.1,48.124 ; v1(87.6,64.625) 92.1,69.125 102.1,69.125 103.101,70.125 103.101,73.123 v1@101.6,74.624
  Bottom Layer w0.15: v1(88.1,48.125) 88.225,48 U3.93
  other v1: 101.6,74.625
SPI1_MOSI: U1.C13 U3.89 U4.3 | length 56.6
  Top Layer w0.15: U4.3 86.101,79.125 87.351,77.875 87.351,69.376 v1(86.35,68.375)
  Mid-Layer 1 w0.15: v1@86.098,48.127 85.349,48.876 85.35,67.375 v1(86.35,68.375) 86.35,69.125 89.35,72.124 97.099,72.124 98.1,73.125 101.1,73.125 v1(101.6,72.625)
  Bottom Layer w0.15: v1(86.1,48.125) 87.225,47 U3.89@87.225,43.625
SPI1_SCLK: U1.C12 U3.91 U4.4 | length 56
  Top Layer w0.15: U4.4 86.324,79.526 88.1,77.751 88.1,69.125 v1@86.35,67.375
  Mid-Layer 1 w0.15: v1@87.099,48.124 87.099,53.374 85.974,54.499 85.974,66.999 86.35,67.375 v1(86.35,67.375) 90.099,71.126 97.851,71.126 99.35,72.625 v1(100.6,72.625)
  Bottom Layer w0.15: v1(87.1,48.125) 87.725,47.5 U3.91
SYS_CLK: R1.1 R2.1 U1.C8 | length 8.4
  Top Layer w0.15: R2.1@96.299,78.624 96.101,78.624 96.101,73.125 U1.C8 ; R2.1 R1.1
SYS_CLK_EXT: pad.2@100.1,78.625 R2.2 U3.214 | length 53.9
  Top Layer w0.15: R2.2 pad.2@100.1,78.625 ; pad.2@100.099,78.624 114.351,78.624 117.351,75.625 117.351,63.374 120.226,60.499 U3.214
TL_CLK: U1.T7 U3.12 | length 36.6
  Top Layer w0.15: U3.12 67.724,46.249 71.349,49.874 v1@81.349,49.874
  Bottom Layer w0.15: v1@81.349,49.874 86.858,49.874 95.1,58.124 95.1,59.125 v1(95.6,59.625)
  other v1: 81.35,49.875
TL_IN_DAT: U1.U7 U3.6 | length 37.7
  Top Layer w0.15: U3.6 66.225,46.249 71.351,51.375 89.35,51.375 v1@93.599,55.625
  Bottom Layer w0.15: v1@93.599,55.625 95.601,57.626 v1@95.601,58.624
  other v1: 93.6,55.625 95.6,58.625
TL_IN_RDY: U1.U6 U3.60 | length 25.5
  Top Layer w0.15: U3.60 79.726,46.501 82.85,49.625 89.601,49.625 95.1,55.124 95.1,58.124 U1.U6@94.6,58.624
TL_IN_VAL: R10.1 U1.V5 U3.48 | length 25.4
  Top Layer w0.15: U3.48 76.726,46.501 v1(79.35,49.125) ; R10.1@81.783,52.125 v1(82.85,52.125) 88.1,52.125 U1.V5
  Bottom Layer w0.15: v1(79.35,49.125) 82.35,52.125 v1(82.85,52.125)
TL_OUT_DAT: U1.V6 U3.5 | length 36.9
  Top Layer w0.15: v1(73.85,50.625) 89.6,50.625 94.6,55.625 U1.V6@94.6,57.624
  Bottom Layer w0.15: U3.5 66.225,46.25 70.6,50.625 v1(73.85,50.625)
TL_OUT_RDY: R11.1 U1.T5 U3.66 | length 26
  Top Layer w0.15: U3.66 81.225,46.25 v1(84.1,49.125) ; R11.1 83.6,53.625 v1(84.1,54.125)
  Mid-Layer 1 w0.15: v1(84.1,49.125) v1(84.1,54.125)
  Bottom Layer w0.15: v1(84.1,54.125) 88.1,54.126 v1(93.6,59.625)
TL_OUT_VAL: U1.T6 U3.42 | length 28.3
  Top Layer w0.15: U3.42 75.225,46.5 v1(77.85,49.125)
  Bottom Layer w0.15: v1(77.85,49.125) 81.85,53.125 89.1,53.125 94.1,58.125 94.1,59.125 v1(94.6,59.625)
UART0_RX: R9.1 U1.C7 U3.101 | length 39.1
  Top Layer w0.15: v1(91.1,48.125) 92.667,49.692 R9.1
  Mid-Layer 1 w0.15: v1(88.1,57.875) 91.1,54.875 v1(91.1,48.125)
  Bottom Layer w0.15: v1(88.1,57.875) 88.1,67.126 91.1,70.125 94.099,70.125 95.601,71.624 v1(95.6,72.625) ; U3.101 90.225,47.25 v1(91.1,48.125)
UART0_TX: U1.B7 U3.99 | length 37.3
  Mid-Layer 1 w0.15: v1(88.1,56.875) 90.1,54.875 v1(90.1,48.125)
  Bottom Layer w0.15: v1@88.1,56.874 87.099,57.875 87.099,68.126 90.101,71.126 94.102,71.126 95.1,72.124 95.1,73.125 v1(95.6,73.625) ; U3.99 89.725,47.75 v1(90.1,48.125)
pads on no net: CARD1. CARD1.1 CARD1.8 CARD1.9 U1.A1 U1.A2 U1.A3 U1.A4 U1.A8 U1.A10 U1.A11 U1.A12 U1.A15 U1.A16 U1.A17 U1.A18 U1.B1 U1.B3 U1.B4 U1.B9 U1.B10 U1.B16 U1.B17 U1.B18 U1.C1 U1.C2 U1.C3 U1.C4 U1.C9 U1.C10 U1.C11 U1.C15 U1.C16 U1.C17 U1.C18 U1.D4 U1.D5 U1.D6 U1.D13 U1.D14 U1.D15 U1.D17 U1.D18 U1.E1 U1.E2 U1.E4 U1.E6 U1.E13 U1.E15 U1.F4 U1.F5 U1.F6 U1.F13 U1.F14 U1.F15 U1.F17 U1.F18 U1.G1 U1.G2 U1.G4 U1.G5 U1.G6 U1.G13 U1.G14 U1.G15 U1.H4 U1.H6 U1.H13 U1.H15 U1.J1 U1.J2 U1.J4 U1.J5 U1.J6 U1.J13 U1.J14 U1.J15 U1.K4 U1.K5 U1.K6 U1.K13 U1.K14 U1.K15 U1.K17 U1.L1 U1.L2 U1.L4 U1.L6 U1.L8 U1.L13 U1.L15 U1.M4 U1.M5 U1.M6 U1.M9 U1.M10 U1.M13 U1.M14 U1.M15 U1.M17 U1.N1 U1.N2 U1.N4 U1.N5 U1.N6 U1.N13 U1.N14 U1.N15 U1.P4 U1.P6 U1.P13 U1.P15 U1.P17 U1.P18 U1.R1 U1.R2 U1.R4 U1.R5 U1.R6 U1.R13 U1.R14 U1.R15 U1.T1 U1.T2 U1.T3 U1.T4 U1.T14 U1.T15 U1.T16 U1.T17 U1.T18 U1.U1 U1.U3 U1.U4 U1.U15 U1.U16 U1.U18 U1.V1 U1.V2 U1.V3 U1.V4 U1.V14 U1.V15 U1.V16 U1.V17 U1.V18 U2.1 U3. U3.9 U3.11 U3.15 U3.16 U3.17 U3.18 U3.21 U3.22 U3.23 U3.24 U3.27 U3.28 U3.29 U3.30 U3.33 U3.34 U3.35 U3.36 U3.52 U3.53 U3.54 U3.57 U3.59 U3.63 U3.65 U3.69 U3.70 U3.71 U3.72 U3.75 U3.76 U3.77 U3.78 U3.81 U3.82 U3.83 U3.84 U3.88 U3.90 U3.92 U3.94 U3.96 U3.97 U3.98 U3.100 U3.103 U3.104 U3.105 U3.106 U3.108 U3.109 U3.110 U3.111 U3.112 U3.114 U3.115 U3.116 U3.117 U3.120 U3.121 U3.122 U3.123 U3.127 U3.128 U3.130 U3.131 U3.133 U3.134 U3.136 U3.137 U3.139 U3.140 U3.142 U3.143 U3.145 U3.148 U3.149 U3.150 U3.151 U3.154 U3.155 U3.156 U3.157 U3.160 U3.161 U3.162 U3.163 U3.166 U3.167 U3.168 U3.169 U3.172 U3.173 U3.174 U3.175 U3.178 U3.179 U3.180 U3.181 U3.182 U3.183 U3.184 U3.186 U3.188 U3.190 U3.192 U3.193 U3.194 U3.195 U3.196 U3.197 U3.198 U3.199 U3.202 U3.203 U3.204 U3.205 U3.206 U3.207 U3.208 U3.209 U3.211 U3.213 U3.215 U3.220 U3.222 U3.224 U3.226 U3.230 U3.232 U3.233 U3.234 U3.235 U3.236 U3.237 U3.238 U4.7 U4.8 U4.9 U4.10 U4.11 U4.12 U4.13 U4.14
copper on no net: | length 0

## Polygon pours and split planes (outlines as drawn)
1V8 on Bottom Layer (solid): 128.6,46.625 128.6,45.125 129.6,45.125 129.6,41.125 133.1,41.125 133.1,46.625
GND on Bottom Layer (solid): 58.1,94.125 58.1,38.125 154.1,38.125 154.1,94.125
GND on Mid-Layer 4 (solid): 54.1,94.125 54.1,38.125 150.1,38.125 150.1,94.125
0V85 on Mid-Layer 3 (solid): 94.1,76.125 94.1,59.125 124.1,59.125 124.1,75.125 120.1,75.125 120.1,68.125 110.1,68.125 110.1,76.125
3V3 on Mid-Layer 3 (solid): 50.1,94.125 50.1,38.125 146.1,38.125 146.1,94.125
1V8 on Mid-Layer 2 (solid): 46.1,94.125 46.1,38.125 142.1,38.125 142.1,94.125
GND on Mid-Layer 1 (solid): 42.1,94.125 42.1,38.125 138.1,38.125 138.1,94.125
3V3 on Top Layer (solid): 128.6,46.625 128.6,45.125 129.6,45.125 129.6,41.625 133.6,41.625 133.6,46.625
GND on Top Layer (solid): 38.1,94.125 38.1,38.125 134.1,38.125 134.1,94.125

## Keep-outs
Keep-Out Layer:
  lines w0.15: 101.1,45.625 cw(c101.6,45.625) 102.1,45.625

## Silkscreen, mask and mechanical layers (free items; w line width, h text height)
Top Overlay:
  text "0V85" at 129.1,82.125 h1.2
  text "USE_XTAL" at 89.975,80.25 h1.2
  text "USE_EXT" at 90.6,78.25 h1.2
  text "1V8" at 129.725,78.125 h1.2
  text "3V3" at 129.725,74.125 h1.2
  text "JLCJLCJLCJLC" at 74.85,68.875 h1.2 r90
  text "Caution" at 113.225,66.375 h1.2
  text "Hot Die Surface" at 113.35,65.125 h1.2
  text "UC Berkeley EE 194" at 64.85,57.375 h1.2 r359
  text "2022-12-20" at 64.85,55.875 h1.2
  text "SODIMM IO Level 1.8V" at 64.85,53.875 h1.2
  text "TF Card IO Level 3.3V" at 64.85,52.375 h1.2
  text "BearlyML Module Board" at 103.6,52.25 h1.6
  text "Rev1" at 103.6,50.875 h1.2 r359
Document:
  lines w0.05 net S$25875: 60.1,42.125 136.1,42.125 ; 60.1,46.125 136.1,46.125 ; 60.1,89.125 136.1,89.125 ; 63.35,38.125 63.35,92.125 ; 132.85,38.125 132.85,92.125